# Altium PCB Pcb1.PcbDoc
Units mm, origin at the board's own origin, x right, y up, seen from the top; angles counter-clockwise.
Board outline 25.9 x 25.9 mm, 2 copper layers (Top Layer, Bottom Layer), stack 1.569 mm thick; 3 components, 3 nets, 6 pads, 0 vias.
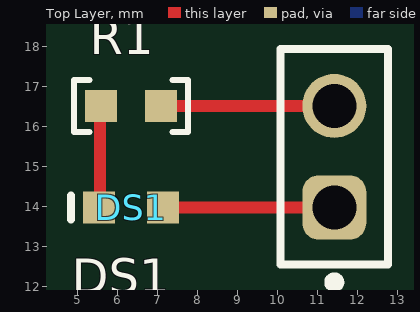
[diagram p0: Top Layer view]
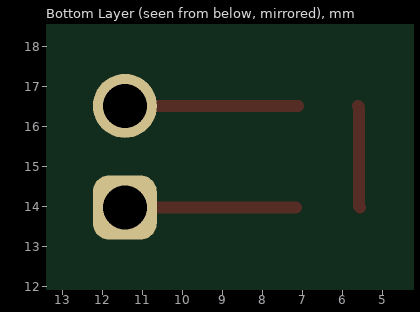
[diagram p1: Bottom Layer view, seen from below]
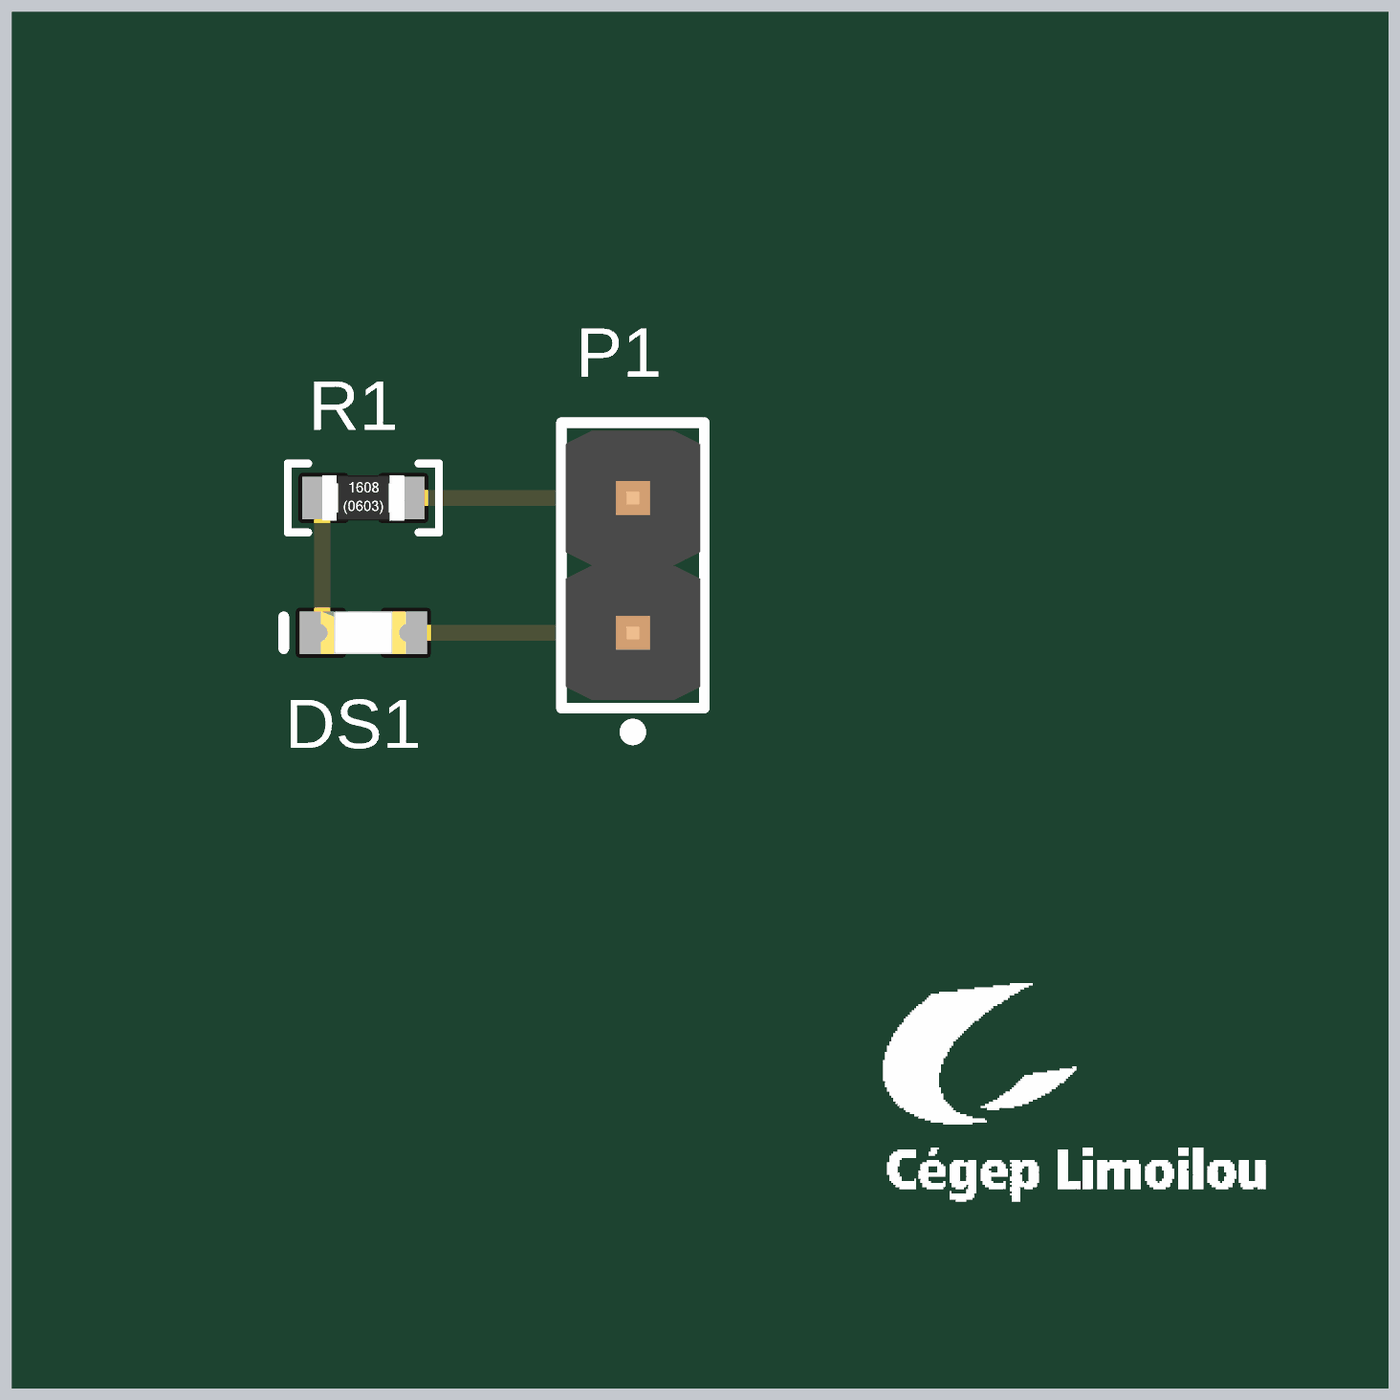
[diagram p2: 3D render of the assembled board from above, using the file's embedded part models]

## Layer stack, top to bottom
Top Solder: solder mask 0.0254, SM-001, Dk 4
Top Layer: signal copper 0.035
Dielectric 1: core 1.4986, Core-043, Dk 4.3
Bottom Layer: signal copper 0.035
Bottom Solder: solder mask 0.0254, SM-001, Dk 4

## Board outline
-0.25,0 -0.25,23.112 -0.25,23.288 -0.25,23.463 cw(c1.707,23.463) 0.323,24.847 cw(c2.262,22.908) 2.262,25.65 2.286,25.65 23.114,25.65 cw(c23.114,23.094) 24.922,24.902 cw(c23.163,23.143) 25.65,23.144 25.65,23.143 25.65,0 cw(c25.4,0) 25.4,-0.25 0,-0.25 cw(c0,0)

## Design rules (kind name [scope] priority, off if disabled: settings)
BoardOutlineClearance [All] p1: gap=0.2 ignorepadtopadclearanceinfootprint=FALSE
Clearance [All] p1: gap=0.15 ignorepadtopadclearanceinfootprint=FALSE
DiffPairsRouting [All] p1: maxlimit=0.125 minlimit=0.125 mostfreqgap=0.125 toplayer_minwidth=0.125 toplayer_maxwidth=0.125 toplayer_prefwidth=0.125 bottomlayer_minwidth=0.125 bottomlayer_maxwidth=0.125 bottomlayer_prefwidth=0.125 maxuncoupledlength=15
HoleSize [All] p1: absolutevalues=TRUE maxlimit=5 minlimit=0.2 maxpercent=80.000 minpercent=20.000
HoleToHoleClearance HoleToHoleClearance_via [All] p1: gap=0.2 allowstackedmicrovias=FALSE
HoleToHoleClearance [All] p2: gap=0.4 allowstackedmicrovias=TRUE
MinimumAnnularRing [All] p1: minimumring=0.15
MinimumSolderMaskSliver [All] p1: minsoldermaskwidth=0.1
PlaneClearance [All] p1: clearance=0.5
PlaneConnect [All] p1: pad.planeconnectstyle=Relief pad.reliefexpansion=0.508 pad.reliefentries=4 pad.reliefconductorwidth=0.254 pad.reliefairgap=0.254 via.planeconnectstyle=Direct via.reliefexpansion=0.508 via.reliefentries=4 via.reliefconductorwidth=0.254 via.reliefairgap=0.254
PolygonConnect [All] p1: thpad.connectstyle=Relief thpad.reliefconductorwidth=0.3 thpad.reliefentries=4 thpad.polygonreliefangle="90 Angle" thpad.airgapwidth=0.2 smdpad.connectstyle=Relief smdpad.reliefconductorwidth=0.3 smdpad.reliefentries=4 smdpad.polygonreliefangle="90 Angle" smdpad.airgapwidth=0.2 via.connectstyle=Direct via.reliefconductorwidth=0.254 via.reliefentries=4 via.polygonreliefangle="90 Angle" via.airgapwidth=0.254
RoutingVias [All] p1: holewidth=0.5 width=0.8 viastyle="Through Hole" minholewidth=0.3 minwidth=0.6 maxholewidth=0.7 maxwidth=1.2
SilkToSilkClearance [All] p1: silktosilkclearance=0
SilkToSolderMaskClearance [IsPad] p1: minsilkscreentomaskgap=0.15 clearancetoexposedcopper=TRUE
SolderMaskExpansion [All] p1: expansion=0.075 istentingtop=FALSE
Width [All] p1: maxlimit=5 minlimit=0.15 preferedwidth=0.2
22 further rules are at their usual default settings.

## Components (designator, comment, footprint, x,y, rotation, side; value= is the part's Value field where it differs from the comment)
DS1 "XL-1608UOC-06" D_LED_0603 6.35,13.97 r0 top value=Orange
P1 "61300211121" CONN_HDR_2POS_100MILS_TH 11.43,15.24 r90 top
R1 "Res 1k 1% 0603" R_1608[0603] 6.35,16.51 r0 top value=1k

## Footprints (in the part's own frame and the unit in brackets; to place one, negate y for a bottom-side part, rotate by r counter-clockwise, add the part's x,y. Pads: shape width x height; smd on the part's side, far side on the other; paste and mask are expansions set on the pad)
CONN_HDR_2POS_100MILS_TH [mm] "Pin Header, pitch 2.54 mm, THT, Vertical, single row, 2p"
  rrect50% 1.6x1.6 hole 1.1: 1(-1.27,0)
  round 1.6 hole 1.1: 2(1.27,0)
  silkscreen extent -3.26,-1.35 2.69,1.35, body extent -2.54,-1.27 2.54,1.27, height 8.57
D_LED_0603 [mm] "Chip LED, 2-Leads, Body 1.6x0.8mm, IPC Medium Density"
  rect 0.8x0.8 smd: 1(-0.8,0) 2(0.8,0)
  silkscreen extent -1.5,-0.3 -1.5,0.3, body extent -0.8,-0.4 0.8,0.4, height 0.7
R_1608[0603] [mm] "Chip Resistor; Body 1.6 x 0.8 mm (LxW typ)"
  rect 0.8x0.8 smd: 1(-0.75,0) 2(0.75,0)
  silkscreen extent -1.43,-0.65 1.43,0.65, body extent -0.77,-0.42 0.78,0.43, height 0.45

## Part data
DS1: library part D_LED_ORANGE_0603, "LED Orange Clear", Manufacturer 1=XINGLIGHT, Manufacturer 2=Wurth, Manufacturer Part Number 2=150060AS75000, Supplier Part Number 1=C965800, Code CEGEP=KLEDOC0603, Manufacturer Part Number 1=XL-1608UOC-06, Mounting Technology=SMT, Supplier 1=LCSC, Supplier 2=Digikey, Supplier Part Number 2=732-150060AS75000CT-ND
P1: library part CONN-100MIL-HDR-01X02, "CONN HEADER 2POS 100MIL", Manufacturer 1=Megastar, Manufacturer 2="Würth Elektronik", Manufacturer Part Number 1=ZX-PZ2.54-1-2PZZ, Supplier Part Number 1=C7501260, Manufacturer Part Number 2=61300211121, Mounting Technology=TH, Supplier 1=LCSC
R1: library part RES015, "Resistor type 1", Manufacturer 1=Yageo, Manufacturer Part Number 1=RC0603FR-071KL, Max Working Voltage=75V, Supplier Part Number 1=C22548, Tolerance=1%, LibRef=RES015, Mounting Technology=SMT, Puissance=1/10W, Supplier 1=LCSC

## Nets (pads, with @x,y where several pads share a name; then routed paths per layer and width w, separated by ;. In a path a pad name is that pad's centre, name@x,y a point inside that pad or via, vN(x,y) a via of type N, cw(c..) or ccw(c..) an arc to the next point about the centre after c; other vN are vias at no path point)
NetDS1_1: DS1.1 R1.1 | length 2.6
  Top Layer w0.3: DS1.1 5.575,13.995 5.575,16.485 R1.1
NetDS1_2: DS1.2 P1.1 | length 4.3
  Top Layer w0.3: DS1.2 P1.1
NetP1_2: P1.2 R1.2 | length 4.3
  Top Layer w0.3: R1.2 P1.2

## Silkscreen, mask and mechanical layers (free items; w line width, h text height)
Top Overlay:
  drawing of 18 lines, arcs and shapes, not listed
  text ".NomDeProjet" at 1.741,7.367 h1.5
  text ".Revision" at 1.741,6.1 h1.5
  text ".Print_Date" at 1.739,4.102 h1.5
  text ".NomDeLetudiant" at 1.5,3.015 h1.5
Board:
  lines w0.5: 0,23.114 0,23.463 cw(c1.707,23.463) 0.5,24.67 cw(c2.262,22.908) 2.262,25.4 ; 0,23.288 0,0 25.4,0 25.4,23.143 ccw(c23.163,23.143) 24.745,24.725 ccw(c23.114,23.094) 23.114,25.4 2.286,25.4
Drill Drawing:
  lines w0.25: 36.256,5.351 124.363,5.351 ; 36.256,8.454 124.363,8.454 ; 36.716,22 42.991,22 59,22 67.958,22 75.08,22 ; 36.716,25 42.991,25 59,25 67.958,25 75.08,25 ; 36.716,28 42.991,28 59,28 67.958,28 75.08,28 ; 36.716,31 42.991,31 59,31 67.958,31 75.08,31 ; 36.716,34 42.991,34 59,34 67.958,34 75.08,34 ; 36.716,37 42.991,37 59,37 67.958,37 75.08,37 ; 36.716,40 42.991,40 59,40 67.958,40 75.08,40 ; 36.716,43 42.991,43 59,43 67.958,43 75.08,43 ; 36.716,46 75.08,46 ; 42.991,49 42.991,19 ; 44.228,2.248 44.228,11.557 ; 50.29,2.248 50.29,11.557 ; 59,49 59,19 ; 63.889,2.248 63.889,11.557 ; 67.958,49 67.958,19 ; 70.071,2.248 70.071,11.557 ; 79.069,2.248 79.069,11.557 ; 96.131,2.248 96.131,11.557 ; 103.504,2.248 103.504,11.557 ; 113.135,2.248 113.135,11.557 ; 42.991,19 59,19 ; 42.991,19 36.716,19 36.716,49 75.08,49 75.08,19 67.958,19 ; 59,19 67.958,19 ; 36.256,2.248 124.363,2.248 124.363,11.557 36.256,11.557 36.256,2.248
  lines w0.254: 37.507,6.282 38.886,6.282 38.886,7.661 37.507,7.661 37.507,6.282
  text "Layer" at 38.216,46.75 h1.5
  text "Name" at 44.491,46.75 h1.5
  text "Thickness" at 60.5,46.75 h1.5
  text "Gerber" at 69.458,46.75 h1.5
  text "Top Overlay" at 44.491,43.75 h1.5
  text "GTO" at 69.458,43.75 h1.5
  text "Top Solder" at 44.491,40.75 h1.5
  text "0.025mm" at 60.5,40.75 h1.5
  text "GTS" at 69.458,40.75 h1.5
  text "Top Surface Finish" at 44.491,37.75 h1.5
  text "0.020mm" at 60.5,37.75 h1.5
  text "1" at 38.216,34.75 h1.5
  text "Top Layer" at 44.491,34.75 h1.5
  text "0.035mm" at 60.5,34.75 h1.5
  text "GTL" at 69.458,34.75 h1.5
  text "Dielectric 1" at 44.491,31.75 h1.5
  text "1.499mm" at 60.5,31.75 h1.5
  text "2" at 38.214,28.75 h1.5
  text "Bottom Layer" at 44.491,28.75 h1.5
  text "0.035mm" at 60.5,28.75 h1.5
  text "GBL" at 69.458,28.75 h1.5
  text "Bottom Surface Finish" at 44.491,25.75 h1.5
  text "0.020mm" at 60.5,25.75 h1.5
  text "Bottom Solder" at 44.491,22.75 h1.5
  text "0.025mm" at 60.5,22.75 h1.5
  text "GBS" at 69.458,22.75 h1.5
  text "Bottom Overlay" at 44.491,19.75 h1.5
  text "GBO" at 69.458,19.75 h1.5
  text "Total board thickness:" at 38.216,16.75 h1.5
  text "1.659mm" at 60.5,16.75 h1.5
  text "Symbol" at 38.117,9.385 h1.8
  text "Count" at 45.158,9.385 h1.8
  text "Hole Size" at 51.221,9.385 h1.8
  text "Plated" at 64.82,9.385 h1.8
  text "Hole Type" at 71.002,9.385 h1.8
  text "Drill Layer Pair" at 80,9.385 h1.8
  text "Via/Pad" at 97.062,9.385 h1.8
  text "Pad Shape" at 104.435,9.385 h1.8
  text "Hole Length" at 114.066,9.385 h1.8
  text "2" at 45.158,6.282 h1.5
  text "1.100mm (43.31mil)" at 51.221,6.282 h1.5
  text "PTH" at 64.82,6.282 h1.5
  text "Round" at 71.002,6.282 h1.5
  text "Top Layer - Bottom Layer" at 80,6.282 h1.5
  text "Pad" at 97.062,6.282 h1.5
  text "(Mixed)" at 104.435,6.282 h1.5
  text "-" at 114.066,6.282 h1.5
  text "2 Total" at 45.158,3.178 h1.5

## Dimensions
0,23.288 to 25.4,0 on Drill Drawing
0,0 to 2.286,25.4 on Drill Drawing